# Altium PCB sensor_good.PcbDoc (part 3 of 3)
Units mil, origin at the board's own origin, x right, y up, seen from the top; angles counter-clockwise.
Board outline 3543.31 x 2755.91 mil, 6 copper layers (TOP, GND1, Sig1, Sig2, GND2, BOT), stack 32.112 mil thick; 126 components, 166 nets, 710 pads, 273 vias.
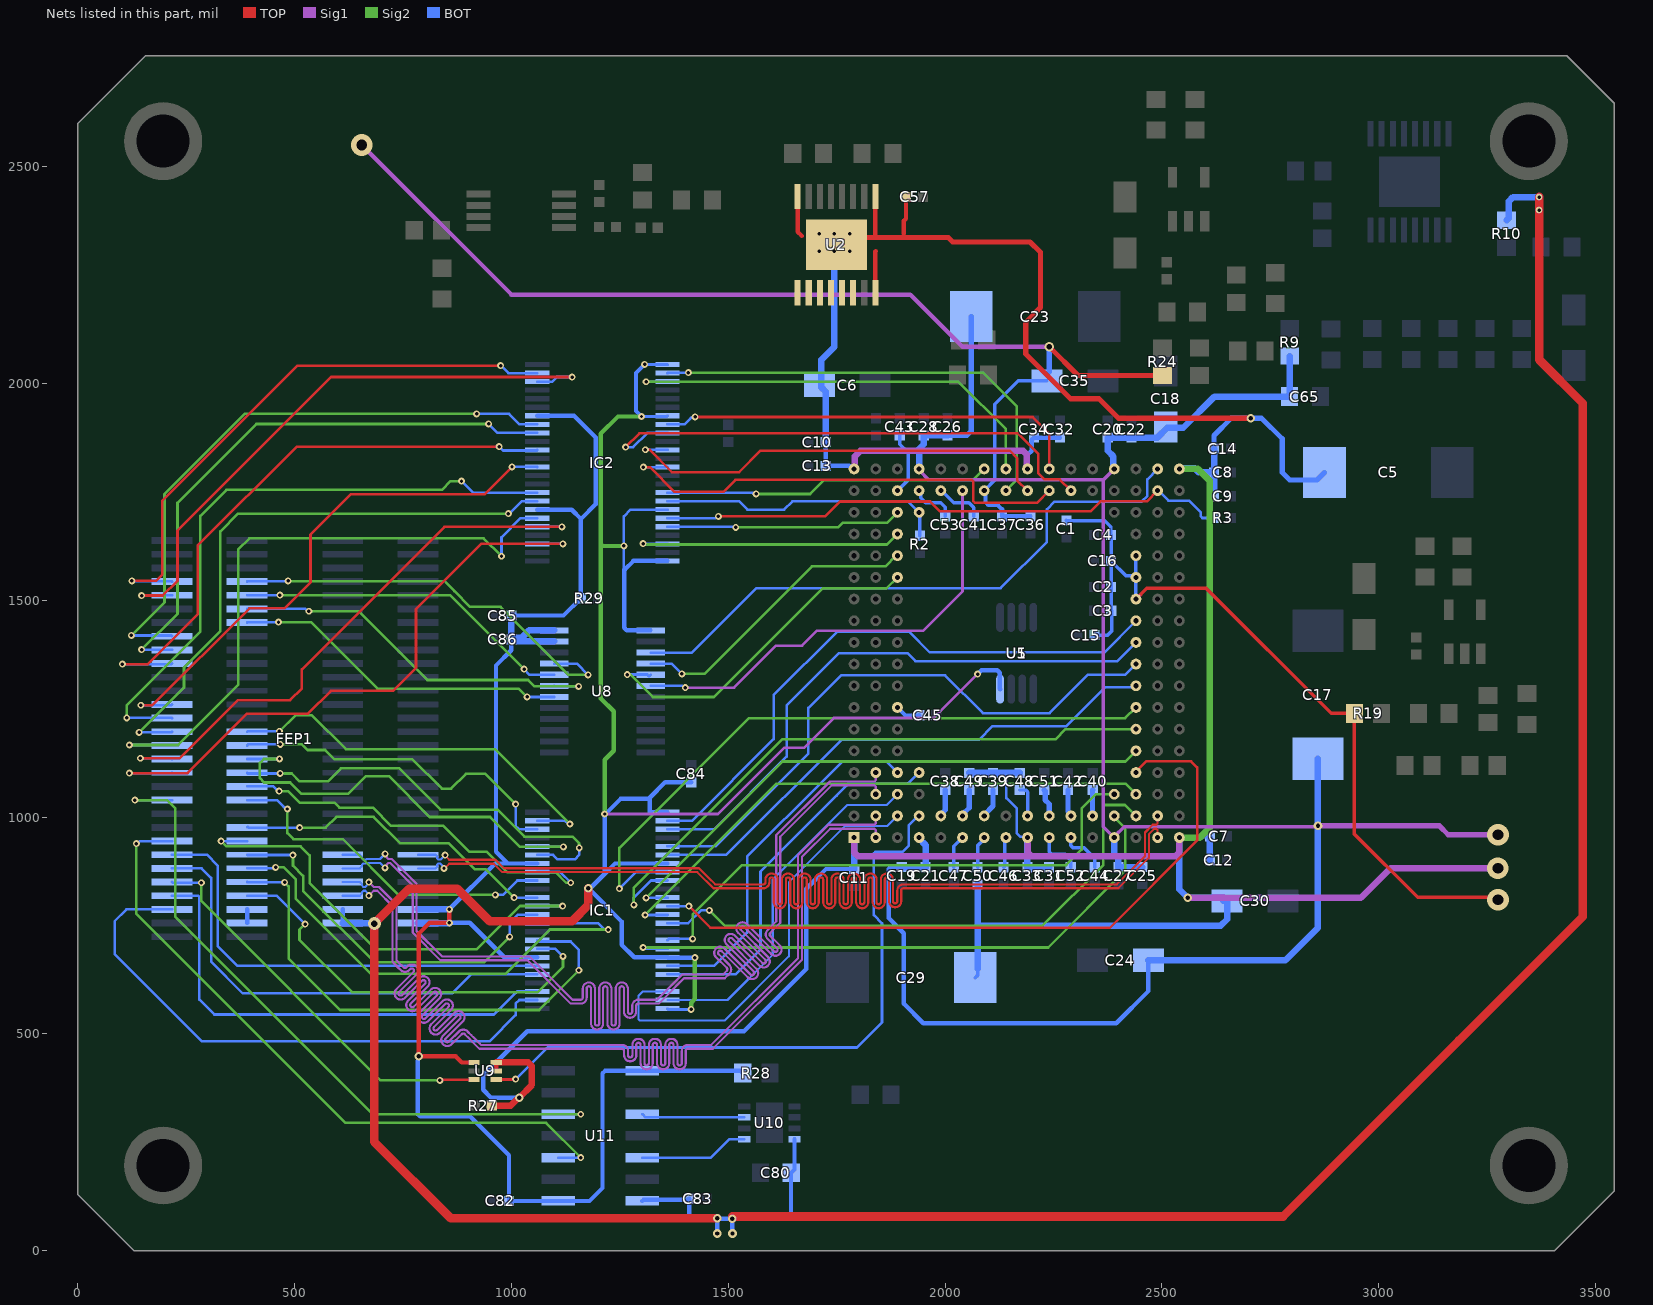
[diagram p7: the nets of this part, all layers, seen from the top]

## Via types
v1: diameter 16, hole 8, TOP to BOT, 215 vias
v2: diameter 20, hole 10, TOP to BOT, 40 vias
v3: diameter 30, hole 15, TOP to BOT, 8 vias
v4: diameter 50, hole 25, TOP to BOT, 5 vias
v5: diameter 19.7, hole 7.99, TOP to BOT, 2 vias
v6: diameter 19.7, hole 8, TOP to BOT, 2 vias
v7: diameter 22, hole 12, TOP to BOT, 1 vias

## Nets (pads, with @x,y where several pads share a name; then routed paths per layer and width w, separated by ;. In a path a pad name is that pad's centre, name@x,y a point inside that pad or via, vN(x,y) a via of type N, cw(c..) or ccw(c..) an arc to the next point about the centre after c; other vN are vias at no path point) (continued)
OUT6_TOP_N: FEP1.B6 U1.B3 | length 2857.5
  Sig1 w5: v1(708.56,882.94) 708.56,885.92 713.09,890.44 713.09,891.75 716.01,894.68 720.16,894.68 772.41,842.43 772.41,733.86 836.27,670 1037.27,670 1137.27,570 1152.64,570 1159.64,570 ccw(c1159.64,584) 1173.64,584 1173.64,605 cw(c1178.64,605) 1183.64,605 1183.64,524.48 ccw(c1197.64,524.48) 1211.64,524.48 1211.64,605 cw(c1216.64,605) 1221.64,605 1221.64,524.48 ccw(c1235.64,524.48) 1249.64,524.48 1249.64,605 cw(c1254.64,605) 1259.64,605 1259.64,551.46 ccw(c1273.64,551.46) 1287.64,551.46 1287.64,565 cw(c1292.64,565) 1292.64,570 1319.11,570 1339.63,570 1397.99,628.36 1471.64,628.36 1492.09,628.36 1502.87,639.14 ccw(c1492.97,649.04) 1502.85,658.96 1478.13,683.68 ; 1478.09,690.76 ccw(c1481.64,687.24) 1478.11,683.69 ; 1478.12,690.79 cw(c1481.64,687.24) 1485.18,690.77 1545.18,630.77 ccw(c1555.12,640.63) 1565.01,630.74 ccw(c1555.12,640.63) 1565,650.55 1502.36,713.19 cw(c1505.91,716.71) 1502.36,720.23 ; 1502.39,720.26 cw(c1505.91,716.71) 1509.44,720.25 ; 1509.47,720.22 1572.05,657.64 ; 1572.05,657.64 ccw(c1581.99,667.5) 1591.88,657.61 ccw(c1581.99,667.5) 1591.87,677.42 1529.23,740.06 cw(c1532.78,743.58) 1529.23,747.1 cw(c1532.78,743.58) 1536.31,747.12 1598.92,684.51 ccw(c1608.86,694.37) 1618.75,684.48 ccw(c1608.86,694.37) 1618.74,704.29 1596.94,726.09 cw(c1600.45,729.65) 1596.91,733.18 ; 1596.94,733.21 1601.86,738.14 1620,756.27 1620,955 1738.45,1073.45 1837.43,1073.45 1840.35,1070.52 U1.B3@1840.35,1052.95
  BOT w5: FEP1.B6@611.18,881.89 650.55,881.89 655.93,887.26 655.93,890.21 658.85,893.14 669.39,893.14 670.93,894.68 696.9,894.68 708.56,883.02 v1(708.56,882.94)
OUT6_TOP_P: FEP1.B7 U1.B4 | length 2857.8
  Sig1 w5: v1(708.72,915.42) 708.72,912.44 713.09,908.08 713.09,906.61 716.01,903.68 723.88,903.68 781.41,846.16 781.41,737.59 840,679 1041,679 1063.93,656.07 1141,579 1152.64,579 1159.64,579 ccw(c1159.64,584) 1164.64,584 1164.64,605 cw(c1178.64,605) 1192.64,605 1192.64,524.48 ccw(c1197.64,524.48) 1202.64,524.48 1202.64,605 cw(c1216.64,605) 1230.64,605 1230.64,524.48 ccw(c1235.64,524.48) 1240.64,524.48 1240.64,605 cw(c1254.64,605) 1268.64,605 1268.64,551.46 ccw(c1273.64,551.46) 1278.64,551.46 1278.64,565 cw(c1292.64,565) 1292.64,579 1319.11,579 1335.9,579 1394.26,637.36 1462.64,637.36 1488.36,637.36 1496.48,645.48 ; 1496.49,645.49 ccw(c1492.97,649.04) 1496.51,652.58 ; 1496.48,652.6 1471.74,677.34 cw(c1481.64,687.24) 1470.43,695.61 1470.43,695.82 1473.06,698.45 1473.27,698.45 cw(c1481.64,687.24) 1491.56,697.12 1551.59,637.09 ccw(c1555.12,640.63) 1558.63,637.08 ; 1515.83,726.59 1578.46,663.96 ccw(c1581.99,667.5) 1585.5,663.95 ; 1515.82,726.6 ccw(c1505.91,716.71) 1497.53,727.93 1497.32,727.93 1494.69,725.3 1494.69,725.09 ccw(c1505.91,716.71) 1496.04,706.78 1558.63,644.2 ; 1558.65,644.17 cw(c1555.12,640.63) 1558.67,637.12 ; 1585.5,671.07 1522.91,733.65 cw(c1532.78,743.58) 1521.56,751.96 1521.56,752.17 1524.19,754.8 1524.4,754.8 cw(c1532.78,743.58) 1542.69,753.47 1605.33,690.83 ccw(c1608.86,694.37) 1612.37,690.82 ; 1585.54,663.99 ccw(c1581.99,667.5) 1585.52,671.04 ; 1612.41,690.86 ccw(c1608.86,694.37) 1612.39,697.91 1590.58,719.72 cw(c1600.45,729.65) 1590.57,739.57 1595.5,744.5 1611,760 1611,958.73 1734.72,1082.45 1837.43,1082.45 1840.35,1085.38 U1.B4@1840.35,1102.95
  BOT w5: FEP1.B7@611.18,913.39 650.55,913.39 655.93,908.01 655.93,905.07 658.85,902.14 665.66,902.14 667.2,903.68 696.9,903.68 v1(708.72,915.42) v1(708.72,915.42)
OUT7_BOT_N: FEP1.A6 U1.R1 | length 2848
  TOP w5: v1(844.65,881.89) 845.88,881.89 856.63,892.65 959.62,892.65 978.99,873.27 1429,873.27 1466.27,836 1574,836 1581,836 ccw(c1581,850) 1595,850 1595,856 cw(c1600,856) 1605,856 1605,804 ccw(c1619,804) 1633,804 1633,856 cw(c1638,856) 1643,856 1643,804 ccw(c1657,804) 1671,804 1671,856 cw(c1676,856) 1681,856 1681,804 ccw(c1695,804) 1709,804 1709,856 cw(c1714,856) 1719,856 1719,804 ccw(c1733,804) 1747,804 1747,856 cw(c1752,856) 1757,856 1757,804 ccw(c1771,804) 1785,804 1785,856 cw(c1790,856) 1795,856 1795,804 ccw(c1809,804) 1823,804 1823,856 cw(c1828,856) 1833,856 1833,804 ccw(c1847,804) 1861,804 1861,856 cw(c1866,856) 1871,856 1871,806.18 ccw(c1885,806.18) 1899,806.18 1899,831 cw(c1904,831) 1904,836 2017.19,836 2399.73,836 2470,906.27 2470,960.88 2482.57,973.45 2487.43,973.45 2490.35,970.52 U1.R1@2490.35,952.95
  BOT w5: FEP1.A6@784.41,881.89 824.98,881.89 828.98,885.89 828.98,890.21 831.91,893.14 836.05,893.14 844.65,884.53 v1(844.65,881.89)
OUT7_BOT_P: FEP1.A7 U1.R2 | length 2846.7
  TOP w5: v1(847.1,912.4) 847.1,911.18 856.63,901.65 963.34,901.65 982.72,882.27 1432.73,882.27 1453.93,861.07 1470,845 1574,845 1581,845 ccw(c1581,850) 1586,850 1586,856 cw(c1600,856) 1614,856 1614,804 ccw(c1619,804) 1624,804 1624,856 cw(c1638,856) 1652,856 1652,804 ccw(c1657,804) 1662,804 1662,856 cw(c1676,856) 1690,856 1690,804 ccw(c1695,804) 1700,804 1700,856 cw(c1714,856) 1728,856 1728,804 ccw(c1733,804) 1738,804 1738,856 cw(c1752,856) 1766,856 1766,804 ccw(c1771,804) 1776,804 1776,856 cw(c1790,856) 1804,856 1804,804 ccw(c1809,804) 1814,804 1814,856 cw(c1828,856) 1842,856 1842,804 ccw(c1847,804) 1852,804 1852,856 cw(c1866,856) 1880,856 1880,806.18 ccw(c1885,806.18) 1890,806.18 1890,831 cw(c1904,831) 1904,845 2017.19,845 2396,845 2461,910 2461,964.61 2478.84,982.45 2487.43,982.45 2490.35,985.38 U1.R2@2490.35,1002.95
  BOT w5: FEP1.A7@784.41,913.39 824.98,913.39 828.98,909.39 828.98,905.07 831.91,902.14 836.54,902.14 846.8,912.4 v1(847.1,912.4)
OUT7_TOP_N: FEP1.B4 U1.B1 | length 2856.7
  Sig1 w5: v1(671.43,818.9) 682.67,830.15 690.85,830.15 726,795 726,666.27 739.91,652.36 743.54,648.73 744.83,647.44 ccw(c754.76,657.31) 764.68,647.43 766.95,649.69 ; 766.97,649.72 cw(c770.51,646.18) 774.02,649.74 ; 774.02,642.62 734.82,603.42 ccw(c744.69,593.5) 734.79,583.6 ccw(c744.69,593.5) 754.61,583.61 793.82,622.82 ; 774.04,642.65 ccw(c770.51,646.18) 774.06,649.7 ; 788.55,549.67 ccw(c798.43,539.76) 788.53,529.86 ccw(c798.43,539.76) 808.35,529.88 ; 788.56,549.68 827.76,588.88 ; 793.84,622.85 cw(c797.38,619.31) 800.89,622.87 ; 800.89,615.75 761.69,576.55 ccw(c771.56,566.63) 761.66,556.73 ccw(c771.56,566.63) 781.48,556.74 820.69,595.95 ; 800.91,615.78 ccw(c797.38,619.31) 800.93,622.83 ; 808.36,529.88 847.56,569.08 ; 820.71,595.98 cw(c824.25,592.44) 827.76,596 ; 827.78,588.91 ccw(c824.25,592.44) 827.8,595.96 ; 842.29,495.93 ccw(c852.17,486.02) 842.27,476.12 ccw(c852.17,486.02) 862.09,476.14 ; 842.3,495.94 881.5,535.14 ; 847.58,569.11 cw(c851.12,565.57) 854.63,569.13 ; 854.67,569.09 cw(c851.12,565.57) 854.65,562.04 815.43,522.81 ccw(c825.3,512.89) 815.4,502.99 ccw(c825.3,512.89) 835.22,503.01 874.43,542.21 ; 862.1,476.14 885.55,499.6 ; 874.45,542.24 cw(c877.99,538.7) 881.5,542.26 ; 881.52,535.17 ccw(c877.99,538.7) 881.54,542.22 ; 885.56,499.61 cw(c889.11,496.09) 892.66,499.61 902.51,489.76 ccw(c905.71,492.93) 902.55,489.72 907.48,484.79 926.27,466 1222.76,466 1255,466 cw(c1255,461) 1260,461 1260,450.98 ccw(c1274,450.98) 1288,450.98 1288,474.87 cw(c1293,474.87) 1298,474.87 1298,432.57 ccw(c1312,432.57) 1326,432.57 1326,474.87 cw(c1331,474.87) 1336,474.87 1336,432.57 ccw(c1350,432.57) 1364,432.57 1364,474.87 cw(c1369,474.87) 1374,474.87 1374,432.57 ccw(c1388,432.57) 1402,432.57 1402,461 cw(c1407,461) 1407,466 1414,466 1464.73,466 1670,671.27 1670,908.45 1735,973.45 1837.43,973.45 1840.35,970.52 U1.B1@1840.35,952.95
  BOT w5: FEP1.B4@611.18,818.9 650.55,818.9 655.93,824.27 655.93,827.22 658.85,830.15 663,830.15 671.43,821.72 v1(671.43,818.9)
OUT7_TOP_P: FEP1.B5 U1.B2 | length 2856.7
  Sig1 w5: v1(671.43,850.39) 682.67,839.15 694.58,839.15 735,798.73 735,670 746.28,658.72 749.91,655.09 751.21,653.79 ; 741.15,589.97 cw(c744.69,593.5) 741.16,597.03 ; 741.16,589.96 ccw(c744.69,593.5) 748.23,589.96 787.45,629.19 ; 741.18,597.06 780.38,636.26 ccw(c770.51,646.18) 780.41,656.08 ccw(c770.51,646.18) 760.59,656.07 758.32,653.8 ; 751.21,653.79 ccw(c754.76,657.31) 758.31,653.79 ; 768.03,563.09 ccw(c771.56,566.63) 775.1,563.09 ; 768.02,563.1 cw(c771.56,566.63) 768.03,570.16 807.25,609.39 ; 775.12,563.12 814.32,602.32 cw(c824.25,592.44) 834.15,602.34 cw(c824.25,592.44) 834.13,582.53 794.92,543.32 ; 787.46,629.2 cw(c797.38,619.31) 807.28,629.21 cw(c797.38,619.31) 807.26,609.4 ; 794.9,543.29 ccw(c798.43,539.76) 794.89,536.23 ccw(c798.43,539.76) 801.97,536.22 ; 801.99,536.25 841.19,575.45 cw(c851.12,565.57) 861.02,575.47 cw(c851.12,565.57) 861,555.66 821.79,516.45 ; 821.77,516.42 ccw(c825.3,512.89) 821.76,509.36 ccw(c825.3,512.89) 828.84,509.35 ; 828.86,509.38 868.06,548.58 cw(c877.99,538.7) 887.89,548.6 cw(c877.99,538.7) 887.87,528.79 848.66,489.58 ; 848.64,482.48 ccw(c852.17,486.02) 855.71,482.48 ; 848.63,482.49 cw(c852.17,486.02) 848.64,489.55 ; 855.73,482.51 879.19,505.96 cw(c889.11,496.09) 899.03,505.97 907.57,497.43 913.84,491.16 927.28,477.72 930,475 1222.76,475 1255,475 cw(c1255,461) 1269,461 1269,450.98 ccw(c1274,450.98) 1279,450.98 1279,474.87 cw(c1293,474.87) 1307,474.87 1307,432.57 ccw(c1312,432.57) 1317,432.57 1317,474.87 cw(c1331,474.87) 1345,474.87 1345,432.57 ccw(c1350,432.57) 1355,432.57 1355,474.87 cw(c1369,474.87) 1383,474.87 1383,432.57 ccw(c1388,432.57) 1393,432.57 1393,461 cw(c1407,461) 1407,475 1414,475 1461,475 1661,675 1661,912.18 1731.27,982.45 1837.43,982.45 1840.35,985.38 U1.B2@1840.35,1002.95
  BOT w5: FEP1.B5@611.18,850.39 650.55,850.39 655.93,845.02 655.93,842.07 658.85,839.15 663,839.15 671.43,847.57 v1(671.43,850.39)
R_VREF_FL: C46.1 U1.H1 | length 70.8
  BOT w8: C46.1@2135,884.37 2137.68,887.05 2137.68,950.28 U1.H1@2140.35,952.95
RAMP: U1.R18 U8.3 | length 1411.1
  BOT w6: U8.3@1321,1379.57 1416.39,1379.57 1565.14,1528.32 2128.32,1528.32 2235,1635 2235,1710 2252.49,1727.49 2453.24,1727.49 2466.6,1740.85 2466.6,1779.2 U1.R18@2490.35,1802.95
RAMP_25: FEP1.C27 U8.21 | length 965.5
  Sig2 w6: v1(485,1545) 485.79,1544.21 845.79,1544.21 868.71,1521.29 905,1485 975,1485 1131.69,1328.31 v1(1177.05,1328.31)
  BOT w6: FEP1.C27@390.71,1543.31 391.56,1544.15 484.15,1544.15 v1(485,1545) ; U8.21@1099,1353.98 1151.38,1353.98 v1(1177.05,1328.31)
READ: IC2.13 U1.K17 | length 1087
  TOP w6: v1(1304.49,1807.03) 1319.4,1807.03 1376.43,1750 1488.75,1750 1516.54,1777.79 2062.01,1777.79 2065.53,1774.28 2065.53,1728.51 2069.04,1725 2212.4,1725 U1.K17@2240.35,1752.95
  BOT w6: v1(1304.49,1807.03) 1359.55,1807.03 IC2.13@1360,1807.48
READ_25: FEP1.D18 IC2.36 | length 1279.4
  TOP w6: v1(145.53,1258.13) 172.12,1258.13 395.74,1481.75 477.12,1481.75 536.71,1541.34 536.71,1651.89 629.82,1745 938.83,1745 v1(1001.47,1807.64)
  BOT w6: v1(145.53,1258.13) 215.77,1258.13 FEP1.D18@217.48,1259.84 ; v1(1001.47,1807.64) 1059.68,1807.64 IC2.36@1059.84,1807.48
ROW<0>: IC1.2 U1.P11 | length 1369.9
  BOT w6: IC1.2@1360.08,991.69 1416.69,991.69 1605,1180 1605,1281.84 1750.41,1427.24 1917.76,1427.24 1964.77,1380.23 2367.64,1380.23 U1.P11@2440.35,1452.95
ROW<0>_25: FEP1.C16 IC1.47 | length 942.4
  Sig2 w6: v1(464.95,1198.14) 501.82,1235 540,1235 618.2,1156.8 962.58,1156.8 v1(1135.12,984.25)
  BOT w6: FEP1.C16@390.71,1196.85 392,1198.14 v1(464.95,1198.14) ; IC1.47@1059.92,991.69 1123.73,991.69 1131.17,984.25 v1(1135.12,984.25)
ROW<1>: IC1.3 U1.P10 | length 1342.9
  BOT w6: IC1.3@1360.08,972.01 1467.01,972.01 1635,1140 1635,1257.62 1755.77,1378.38 1913.05,1378.38 1931.43,1360 2397.4,1360 U1.P10@2440.35,1402.95
ROW<1>_25: FEP1.C15 IC1.46 | length 809.4
  Sig2 w6: v1(467,1168.07) 516.93,1168.07 530,1155 570.35,1155 591.5,1133.86 771.36,1133.86 839.65,1065.58 860.79,1065.58 895.22,1100 940,1100 975,1065 v1(1010,1030)
  BOT w6: FEP1.C15@390.71,1165.35 393.43,1168.07 v1(467,1168.07) ; v1(1010,1030) 1010,980 1015.02,974.98 1017.99,972.01 IC1.46@1059.92,972.01
ROW<2>: IC1.5 U1.P9 | length 1387.8
  BOT w6: IC1.5@1360.08,932.64 1470.46,932.64 1685,1147.18 1685,1251.73 1760.37,1327.1 2000.16,1327.1 2087.26,1240 2241.13,1240 2329.67,1328.55 2415.95,1328.55 U1.P9@2440.35,1352.95
ROW<2>_25: FEP1.C14 IC1.44 | length 1019.4
  Sig2 w6: v1(465.3,1134.25) 429.25,1134.25 420,1125 420,1090 430,1080 490,1080 516.39,1053.61 623.61,1053.61 664.72,1094.72 717.33,1094.72 811.59,1000.45 951.05,1000.45 1020,931.51 v1(1120.16,931.51)
  BOT w6: FEP1.C14@390.71,1133.86 391.1,1134.25 v1(465.3,1134.25) ; IC1.44@1059.92,932.64 1061.05,931.51 v1(1120.16,931.51)
ROW<3>: IC1.6 U1.P8 | length 1241.8
  BOT w6: IC1.6@1360.08,912.95 1495.45,912.95 1760.82,1178.32 2078.32,1178.32 2110,1210 2280,1210 2370,1300 2437.4,1300 U1.P8@2440.35,1302.95
ROW<3>_25: FEP1.C13 IC1.43 | length 989.6
  Sig2 w6: v1(466.66,1100.76) 493.56,1100.76 511.7,1082.63 577.33,1082.63 607.15,1112.45 741.47,1112.45 836.57,1017.34 967.91,1017.34 1030.25,955 1141.39,955 1155.92,940.46 1155.92,929.58 v1(1156.5,929)
  BOT w6: FEP1.C13@390.71,1102.36 392.31,1100.76 v1(466.66,1100.76) ; IC1.43@1059.92,912.95 1096.46,912.95 1106.53,902.88 1146.43,902.88 1156.5,912.95 v1(1156.5,929)
ROW<4>: IC1.8 U1.P7 | length 1546.1
  Sig2 w6: v1(1249.15,835.21) 1249.15,929.19 1548.1,1228.14 2415.55,1228.14 U1.P7@2440.35,1252.95
  BOT w6: v1(1249.15,835.21) 1287.52,873.58 IC1.8@1360.08,873.58
ROW<4>_25: FEP1.C12 IC1.41 | length 925.5
  Sig2 w6: v1(464.44,1060.04) 484.95,1060.04 512.11,1032.87 592.87,1032.87 603.74,1022.01 680.97,1022.01 722.97,980 843.27,980 903.27,920 943.37,920 990.1,873.27 1101.73,873.27 1126.22,848.78 v1(1136.95,848.78)
  BOT w6: FEP1.C12@390.71,1070.87 451.22,1070.87 462.05,1060.04 v1(464.44,1060.04) ; IC1.41@1059.92,873.58 1112.15,873.58 v1(1136.95,848.78)
ROW<5>: IC1.9 U1.P6 | length 1459.8
  Sig2 w6: v1(1282.37,797.69) 1282.37,837.35 1338.29,893.27 1624.34,1179.32 2254.32,1179.32 2277.95,1202.95 U1.P6@2440.35,1202.95
  BOT w6: v1(1282.37,797.69) 1282.37,814.39 1321.88,853.9 IC1.9@1360.08,853.9
ROW<5>_25: FEP1.C11 IC1.40 | length 805.9
  Sig2 w6: v1(483.31,1018.87) 483.31,963.17 497.26,949.22 611.15,949.22 739.37,821 v1(963.34,821)
  BOT w6: FEP1.C11@390.71,1039.37 459.57,1039.37 475.67,1023.27 476.21,1023.27 480.61,1018.87 v1(483.31,1018.87) ; v1(963.34,821) 980.91,821 1013.81,853.9 IC1.40@1059.92,853.9
ROW<6>: IC1.11 U1.P5 | length 1319.7
  Sig2 w6: v1(1310.65,814.07) 1624.91,1128.33 2415.73,1128.33 U1.P5@2440.35,1152.95
  BOT w6: v1(1310.65,814.07) 1359.62,814.07 IC1.11@1360.08,814.53
ROW<6>_25: FEP1.C9 IC1.38 | length 758.4
  Sig2 w6: v1(511.74,975.83) 571.34,975.83 596.42,1000.91 682.62,1000.91 743.53,940 855.22,940 915.22,880 940.84,880 v1(1006.47,814.37)
  BOT w6: FEP1.C9@390.71,976.38 392.19,977.86 394.22,975.83 v1(511.74,975.83) ; v1(1006.47,814.37) 1059.77,814.37 IC1.38@1059.92,814.53
ROW<7>: IC1.12 U1.P4 | length 1652.7
  TOP w6: v1(1409.36,794.75) 1459.11,745 2379.93,745 2581.38,946.46 2581.38,1114.83 2567.38,1128.83 2463.83,1128.83 2440.35,1105.35 U1.P4@2440.35,1102.95
  BOT w6: IC1.12@1360.08,794.84 1360.17,794.75 v1(1409.36,794.75)
ROW<7>_25: FEP1.C8 IC1.37 | length 1088.9
  Sig2 w6: v1(330.46,944.88) 342.53,932.82 513.85,932.82 535,911.66 535,847.82 687.82,695 920,695 1020.1,795.1 v1(1118.24,795.1)
  BOT w6: v1(330.46,944.88) FEP1.C8@390.71,944.88 ; IC1.37@1059.92,794.84 1060.02,794.74 1060.38,795.1 v1(1118.24,795.1)
ROW<8>: IC1.13 U1.P3 | length 1319.1
  Sig2 w6: v1(1308.59,774.42) 1611.52,1077.35 2415.96,1077.35 U1.P3@2440.35,1052.95
  BOT w6: v1(1308.59,774.42) 1359.34,774.42 IC1.13@1360.08,775.16
ROW<8>_25: FEP1.C7 IC1.36 | length 871.3
  Sig2 w6: v1(496.36,912.65) 496.36,888.09 519.72,864.72 519.72,830.28 685,665 936.65,665 v1(995.82,724.17)
  BOT w6: FEP1.C7@390.71,913.39 391.74,912.35 392.04,912.65 v1(496.36,912.65) ; v1(995.82,724.17) 995.82,756.18 1014.8,775.16 IC1.36@1059.92,775.16
ROW<9>: IC1.14 U1.P2 | length 1311.5
  Sig2 w6: v1(1456.66,785) 1491.66,750 2225,750 2365.17,890.17 2365.17,1024.66 2368.69,1028.18 2415.13,1028.18 U1.P2@2440.35,1002.95
  BOT w6: IC1.14@1360.08,755.47 1407.87,755.47 1437.4,785 v1(1456.66,785)
ROW<9>_25: FEP1.C6 IC1.35 | length 1172.8
  Sig2 w6: v1(456.21,884.1) 475.52,884.1 502.55,857.07 502.55,812.46 675.66,639.34 987.27,639.34 1088.82,740.88 v1(1223.42,740.88)
  BOT w6: FEP1.C6@390.71,881.89 451.29,881.89 453.51,884.1 v1(456.21,884.1) ; IC1.35@1059.92,755.47 1199.71,755.47 1214.31,740.88 v1(1223.42,740.88)
ROW<10>: IC1.16 U1.N3 | length 1258.4
  Sig2 w6: v1(1417.97,719.45) 1417.97,775.71 1531.49,889.22 2279.22,889.22 2315,925 2315,1020 2347.95,1052.95 U1.N3@2390.35,1052.95
  BOT w6: IC1.16@1360.08,716.1 1363.43,719.45 v1(1417.97,719.45)
ROW<10>_25: FEP1.C5 IC1.33 | length 1174.8
  Sig2 w6: v1(477.08,849.81) 486.2,840.69 486.2,673.95 604.75,555.4 1064.12,555.4 v1(1155.71,646.99)
  BOT w6: FEP1.C5@390.71,850.39 391.29,849.81 v1(477.08,849.81) ; IC1.33@1059.92,716.1 1062.83,713.2 1136.59,713.2 1155.71,694.09 v1(1155.71,646.99)
ROW<11>FOT: IC1.17 U1.N2 | length 1378.9
  Sig2 w6: v1(1303.92,699.47) 2238.06,699.47 2415.47,876.88 2415.47,974.53 2390.35,999.65 U1.N2@2390.35,1002.95
  BOT w6: v1(1303.92,699.47) 1306.63,699.47 1309.68,696.42 IC1.17@1360.08,696.42
ROW<11>FOT_25: FEP1.C4 IC1.32 | length 974.5
  Sig2 w6: v1(524.22,753.58) 511.48,740.83 511.48,717.22 632.17,596.53 1060.9,596.53 1119.08,654.71 v1(1119.08,678.84)
  BOT w6: FEP1.C4@390.71,818.9 458.9,818.9 v1(524.22,753.58) ; IC1.32@1059.92,696.42 1101.51,696.42 v1(1119.08,678.84)
RST: IC2.22 U1.C15 | length 655.1
  Sig2 w6: v1(1303.67,1630.66) 1305.58,1628.75 1312.13,1628.75 1312.18,1628.69 1866.1,1628.69 U1.C15@1890.35,1652.95
  BOT w6: v1(1303.67,1630.66) 1303.84,1630.49 1359.83,1630.49 IC2.22@1360,1630.31 1360.27,1630.04 1360.27,1630.39 IC2.22@1360,1630.66
RST_25: FEP1.D13 IC2.27 | length 1456.7
  TOP w6: v1(118.92,1101.54) 253.3,1101.54 390.38,1238.61 531.23,1238.61 583.96,1291.34 727.35,1291.34 780,1343.99 780,1480 930.23,1630.23 v1(1118.92,1630.23)
  BOT w6: v1(118.92,1101.54) 216.65,1101.54 FEP1.D13@217.48,1102.36 ; IC2.27@1059.84,1630.31 1059.93,1630.23 v1(1118.92,1630.23)
RST_DIV_N_IN: IC2.19 R3.1 U1.R17 | length 1336.8
  TOP w6: v1(1477.28,1693.53) 1723.53,1693.53 1757.91,1727.91 1965.65,1727.91 1988.56,1705 2335,1705 2358.45,1728.45 2465.85,1728.45 U1.R17@2490.35,1752.95
  BOT w6: IC2.19@1360,1689.37 1470.42,1689.37 1474.58,1693.53 v1(1477.28,1693.53) ; U1.R17@2490.35,1752.95 2492.05,1752.95 2515,1730 2562.28,1730 2590,1702.28 2590,1693.51 2593.51,1690 R3.1@2620.31,1690
RST_DIV_N_IN_25: FEP1.D15 IC2.30 | length 1499
  Sig2 w6: v1(118.92,1166.42) 231.42,1166.42 370,1305 370,1617.09 395.87,1642.96 935.99,1642.96 v1(977.22,1601.73)
  BOT w6: v1(118.92,1166.42) 216.42,1166.42 FEP1.D15@217.48,1165.35 ; v1(977.22,1601.73) 977.22,1645.21 1021.37,1689.37 IC2.30@1059.84,1689.37
SAM_B: IC2.8 U1.K18 | length 984.9
  TOP w6: v1(1423.79,1922.9) 2202.1,1922.9 2240.35,1884.65 U1.K18@2240.35,1802.95
  BOT w6: IC2.8@1360,1905.91 1398.68,1905.91 1413.77,1920.99 1421.87,1920.99 v1(1423.79,1922.9)
SAM_B_25: FEP1.D23 IC2.41 | length 1398.6
  Sig2 w6: v1(123.65,1419.02) 200,1495.38 200,1745 385,1930 v1(920,1930)
  BOT w6: v1(123.65,1419.02) 215.78,1419.02 FEP1.D23@217.48,1417.32 ; v1(920,1930) 995,1930 1019.09,1905.91 IC2.41@1059.84,1905.91
SAM_T: IC2.9 U1.L17 | length 1231
  TOP w6: v1(1263.42,1853.32) 1295.1,1885 2167.95,1885 2214.69,1838.25 2214.69,1793.82 2229.69,1778.83 2264.48,1778.83 U1.L17@2290.35,1752.95
  BOT w6: v1(1263.42,1853.32) 1280.99,1853.32 1313.89,1886.22 IC2.9@1360,1886.22
SAM_T_25: FEP1.D22 IC2.40 | length 1359
  Sig2 w6: v1(147.52,1386.47) 230,1468.96 230,1725 411.77,1906.77 v1(947.76,1906.77) v1@946.03,1905.04
  BOT w6: v1(147.52,1386.47) 216.84,1386.47 FEP1.D22@217.48,1385.83 ; v1(947.76,1906.77) 968.31,1886.22 IC2.40@1059.84,1886.22
SCK: U10.5 U11.12 | length 252.4
  BOT w6: U11.12@1302,215 1460,215 1502,257 U10.5@1537,257
SCK_25: FEP1.D8 U11.3 | length 1556
  Sig2 w6: v1(135.39,939.03) 135.39,776.9 617.28,295 1080,295 v1(1160,215)
  BOT w6: v1(135.39,939.03) 138.05,939.03 143.9,944.88 FEP1.D8@217.48,944.88 ; U11.3@1108,215 v1(1160,215)
SDO: U10.7 U11.10 | length 237.9
  BOT w6: U11.10@1302,315 1309,308 U10.7@1537,308
SDO_25: FEP1.D11 U11.5 | length 1612
  Sig2 w6: v1(131.99,1039.37) 205.63,1039.37 225,1020 225,770 680,315 v1(1160,315)
  BOT w6: v1(131.99,1039.37) FEP1.D11@217.48,1039.37 ; U11.5@1108,315 v1(1160,315)
SEL: IC2.20 U1.C16 | length 545.5
  Sig2 w6: v1(1517.4,1668.29) 1753.29,1668.29 1763.78,1678.78 1866.18,1678.78 U1.C16@1890.35,1702.95
  BOT w6: IC2.20@1360,1669.69 1360.2,1669.88 1515.8,1669.88 v1(1517.4,1668.29)
SEL_25: FEP1.D14 IC2.29 | length 1348.9
  TOP w6: v1(144.6,1135.84) 235.11,1135.84 369.18,1269.91 489.91,1269.91 516.89,1296.89 516.89,1340.61 845.88,1669.61 v1(1116.45,1669.61)
  BOT w6: v1(144.6,1135.84) 215.5,1135.84 FEP1.D14@217.48,1133.86 ; IC2.29@1059.84,1669.69 1059.92,1669.61 v1(1116.45,1669.61)
SPI_CLK: IC1.23 U1.C3 | length 828.5
  BOT w5: IC1.23@1360.08,578.31 1498.31,578.31 1602.74,682.74 1602.74,856.27 1774.73,1028.26 1865.67,1028.26 U1.C3@1890.35,1052.95
SPI_CLK_25: FEP1.D3 IC1.26 | length 1332.1
  BOT w6: FEP1.D3@217.48,787.4 112.4,787.4 85,760 85,685 286.8,483.2 949.41,483.2 1010,543.79 1010,570 1018.31,578.31 IC1.26@1059.92,578.31
SPI_DATA: IC1.22 U1.C2 | length 1018.7
  BOT w5: IC1.22@1360.08,597.99 1302.99,597.99 1293.24,588.24 1293.24,534.06 1296.17,531.13 1491.71,531.13 1640,679.42 1640,850 1770,980 1867.4,980 U1.C2@1890.35,1002.95
SPI_DATA_25: FEP1.D4 IC1.27 | length 1116.1
  BOT w6: FEP1.D4@217.48,818.9 277.09,818.9 280.6,815.38 280.6,579.4 315,545 960,545 1012.99,597.99 IC1.27@1059.92,597.99
SPI_OUT: U1.D2 U9.4 | length 1510.6
  TOP w6: U9.4@965,395 1008.86,395 v1(1009.91,396.05)
  Sig1 w6: U1.D2@1940.35,1001.84 U1.D2@1940.35,1002.95
  BOT w6: v1(1009.91,396.05) 1010.41,396.05 1083.33,468.97 1796.69,468.97 1854.69,526.97 1854.69,755.31 1836.06,773.94 1836.06,916.49 1839.58,920 1902.38,920 1916.08,933.7 1916.08,981.08 1937.95,1002.95 U1.D2@1940.35,1002.95
SPI_OUT_25: FEP1.D5 U9.3 | length 911.3
  TOP w6: v1(835.15,393.21) 836.04,394.1 912.92,394.1 U9.3@913.82,395
  Sig2 w6: v1(285.14,848.74) 285.14,806.28 698.21,393.21 v1(835.15,393.21)
  BOT w6: FEP1.D5@217.48,850.39 219.13,848.74 v1(285.14,848.74)
SPI_READ: IC1.20 U1.D4 | length 878.6
  BOT w6: IC1.20@1360.08,637.36 1517.36,637.36 1574.55,694.55 1574.55,874.55 1750,1050 1777.19,1077.19 1914.59,1077.19 U1.D4@1940.35,1102.95
SPI_READ_25: FEP1.D6 IC1.29 | length 1092.8
  BOT w6: FEP1.D6@217.48,881.89 285.58,881.89 307.75,859.72 307.75,666.69 380.55,593.89 863.61,593.89 907.08,637.36 IC1.29@1059.92,637.36
SPI_WRITE: IC1.19 U1.C4 | length 838.4
  BOT w6: IC1.19@1360.08,657.05 1467.05,657.05 1543.76,733.76 1543.76,908.76 1720,1085 1763.18,1128.18 1865.13,1128.18 U1.C4@1890.35,1102.95
SPI_WRITE_25: FEP1.D7 IC1.30 | length 1057.6
  BOT w6: FEP1.D7@217.48,913.39 297.71,913.39 322.74,888.35 322.74,702.39 368.08,657.05 IC1.30@1059.92,657.05
SYNC: IC2.11 U1.J17 | length 1042.9
  TOP w6: v1(1308.85,1847.31) 1318.48,1847.31 1370.4,1795.4 1525.4,1795.4 1575,1845 2149.26,1845 2166.5,1827.77 2166.5,1776.81 U1.J17@2190.35,1752.95
  BOT w6: v1(1308.85,1847.31) 1359.54,1847.31 IC2.11@1360,1846.85
SYNC_25: FEP1.D21 IC2.38 | length 1377.1
  TOP w6: v1(102.78,1352.91) 161.76,1352.91 276.67,1467.82 276.67,1626 505.24,1854.57 v1(971.54,1854.57)
  BOT w6: v1(102.78,1352.91) 216.06,1352.91 FEP1.D21@217.48,1354.33 ; v1(971.54,1854.57) 972.07,1854.57 981.15,1845.49 1058.48,1845.49 IC2.38@1059.84,1846.85
SYS_RST_N: IC2.17 R2.1 U1.D16 | length 661.6
  BOT w6: IC2.17@1360,1728.74 1525.01,1728.74 1544.52,1709.23 1629.23,1709.23 1648.3,1728.3 1915,1728.3 U1.D16@1940.35,1702.95
  BOT w8: U1.D16@1940.35,1702.95 1941.23,1702.08 1941.23,1649.77 R2.1@1942.11,1648.89
SYS_RST_N_25: FEP1.D16 IC2.32 | length 1376.9
  Sig2 w6: v1(141.8,1195.59) 245,1298.79 245,1345 328.79,1428.79 328.79,1658.79 369.93,1699.93 v1(993.19,1699.93)
  BOT w6: v1(141.8,1195.59) 216.22,1195.59 FEP1.D16@217.48,1196.85 ; v1(993.19,1699.93) 996.18,1699.93 1024.99,1728.74 IC2.32@1059.84,1728.74
TAC: IC2.16 U1.G18 | length 755.5
  Sig2 w6: v1(1564.58,1745.32) 1688.85,1745.32 1720.64,1777.11 2064.51,1777.11 U1.G18@2090.35,1802.95
  BOT w6: IC2.16@1360,1748.43 1556.06,1748.43 1557.26,1747.23 1562.67,1747.23 v1(1564.58,1745.32)
TAC_25: FEP1.D17 IC2.33 | length 1462
  Sig2 w6: v1(113.09,1228.96) 113.09,1258.37 282.81,1428.09 282.81,1694.71 343.1,1755 840,1755 860,1775 v1(885,1775)
  BOT w6: v1(113.09,1228.96) 216.87,1228.96 FEP1.D17@217.48,1228.35 ; v1(885,1775) 911.57,1748.43 IC2.33@1059.84,1748.43
TR_BLS: IC2.2 U1.H17 | length 1043.1
  Sig2 w6: v1(1408.26,2025.22) 2088.05,2025.22 2165.27,1948 2165.27,1777.87 U1.H17@2140.35,1752.95
  BOT w6: IC2.2@1360,2024.02 1361.2,2025.22 v1(1408.26,2025.22)
TR_BLS_25: FEP1.D27 IC2.47 | length 1340.4
  TOP w6: v1(125,1545) 180,1545 195,1560 195,1730 506.34,2041.34 v1(975.42,2041.34)
  BOT w6: v1(125,1545) 125.85,1544.15 216.63,1544.15 FEP1.D27@217.48,1543.31 ; v1(975.42,2041.34) 975.73,2041.34 993.06,2024.02 IC2.47@1059.84,2024.02
TS_CLIP: IC2.3 U1.H18 | length 1016.4
  Sig2 w6: v1(1310.56,2004.05) 2030.95,2004.05 2140.35,1894.65 U1.H18@2140.35,1802.95
  BOT w6: v1(1310.56,2004.05) 1359.72,2004.05 IC2.3@1360,2004.33
TS_CLIP_25: FEP1.D26 IC2.46 | length 1424.3
  TOP w6: v1(147.32,1511.06) 196.06,1511.06 230,1545 230,1660.75 584.25,2015 v1(1140,2015)
  BOT w6: v1(147.32,1511.06) 147.7,1511.43 217.1,1511.43 FEP1.D26@217.48,1511.81 ; IC2.46@1059.84,2004.33 1094.33,2004.33 1105,2015 v1(1140,2015)
TX1: U1.C14 U8.4 | length 692
  Sig2 w6: v1(1393.01,1330.41) 1445.41,1330.41 1693.35,1578.35 1862.85,1578.35 1887.45,1602.95 U1.C14@1890.35,1602.95
  BOT w6: U8.4@1321,1353.98 1369.45,1353.98 v1(1393.01,1330.41)
TX1_25: FEP1.C26 U8.20 | length 784.3
  Sig2 w6: v1(466.29,1511.89) 858.76,1511.89 v1(1029.27,1341.38)
  BOT w6: FEP1.C26@390.71,1511.81 390.75,1511.85 466.26,1511.85 v1(466.29,1511.89) ; v1(1029.27,1341.38) 1042.26,1328.39 U8.20@1099,1328.39
TX2: U1.C13 U8.5 | length 815.7
  Sig2 w6: v1(1267.28,1328.91) 1274.48,1328.91 1326.18,1277.2 1467.2,1277.2 1718.21,1528.21 1865.61,1528.21 U1.C13@1890.35,1552.95
  BOT w6: v1(1267.28,1328.91) 1313.2,1328.91 1317.36,1324.75 U8.5@1321,1328.39
TX2_25: FEP1.C25 U8.19 | length 894.7
  Sig2 w6: v1(532.92,1474.91) 647.56,1474.91 806.1,1316.37 1038.76,1316.37 1053.44,1301.69 v1(1154.99,1301.69)
  BOT w6: FEP1.C25@390.71,1480.32 524.81,1480.32 530.21,1474.91 v1(532.92,1474.91) ; U8.19@1099,1302.8 1100.11,1301.69 v1(1154.99,1301.69)
VBGAP: C45.1 U1.C7 | length 58.4
  BOT w10: U1.C7@1890.35,1252.95 1909.15,1234.15 1939.78,1234.15 C45.1@1940.63,1235
VCAL: C53.1 U1.D17 | length 104.5
  BOT w8: U1.D17@1940.35,1752.95 1943.61,1749.7 1943.61,1736.39 1955,1725 1989.96,1725 2000.71,1714.25 C53.1@2000.71,1693.94
VCC1V8: FEP1.C2 FEP1.C3 | length 31.5
  BOT w10: FEP1.C2@390.71,755.91 FEP1.C3@390.71,787.4
VCC2V5: C82.2 C85.2 C86.2 FEP1.A2 FEP1.A3 IC1.31 IC1.42 IC2.31 IC2.42 R28.2 R29.2 U8.23 U8.24 U9.1 U11.1 U11.8 | length 4098.8
  TOP w10: v1(856.91,787.47) 857.02,787.36 v1@857.02,756.34 ; v1(857.13,756.34) v1@857.02,756.34 ; U9.1@913.82,434.37 885.63,434.37 871.69,448.31 v2(786.66,448.31) 786.66,731.66 811.34,756.34 v1@857.02,756.34
  BOT w10: v2(786.66,448.31) 784.75,446.4 784.75,439.33 783.92,438.5 783.92,315.86 789.78,310 905,310 994.37,220.63 C82.2@994.37,115 U11.1@1108,115 1180,115 1210,145 1210,409.14 1215.86,415 U11.8@1302,415 1528.5,415 R28.2@1533.5,410 ; v1(856.91,787.47) 962.71,893.27 991.53,893.27 ; v1(857.13,756.34) 903.83,756.34 983.44,676.73 IC1.31@1059.92,676.73 ; C86.2@999.69,1410 999.69,1384.97 964.39,1349.67 964.39,920.41 991.53,893.27 ; C85.2@999.69,1465 1120.31,1465 R29.2@1160.31,1505 1160.31,1687.8 ; IC2.31@1059.84,1709.06 1139.06,1709.06 1160.31,1687.8 ; IC2.42@1059.84,1925.59 1144.41,1925.59 1194.4,1875.6 1194.4,1721.88 1160.31,1687.8 ; IC1.42@1059.92,893.27 991.53,893.27
  BOT w15: FEP1.A2@784.41,755.91 856.43,755.91 856.86,756.34 v1(857.13,756.34) ; FEP1.A3@784.44,787.44 v1@856.88,787.44 ; C85.2@999.69,1465 C86.2@999.69,1410 ; U8.23@1099,1405.16 1004.53,1405.16 C86.2@999.69,1410 ; U8.24@1099,1430.75 1040.75,1430.75 1024.31,1414.31 1004,1414.31 C86.2@999.69,1410
VCC3V3: C80.2 C83.2 C84.2 FEP1.B2 FEP1.B3 IC1.1 IC1.7 IC1.18 IC1.24 IC2.1 IC2.7 IC2.18 IC2.24 R10.1 U5.8 U8.1 U10.4 U11.14 | length 10898.3
  TOP w20: v2(1177.53,836.14) 1177.53,797.53 1140.11,760.11 949.89,760.11 875,835 764.17,835 v3(683.85,754.68) 683.85,251.15 860,75 v2(1475,75) ; v2(1509.31,74.3) 1509.31,79.31 2779.31,79.31 3185,485 3470.96,770.96 3470.96,1954.04 3370,2055 v1(3370,2400) v1(3370,2430)
  Sig1 w6: v1(1215.21,1007.31) 1476.36,1007.31 1629.05,1160 1675,1160 1743.67,1228.67 1973.67,1228.67 v1(2075,1330)
  Sig2 w10: v1(1215.21,1007.31) 1215.21,1132.54 1235.93,1153.26 1235.93,1244.07 1206.34,1273.66 1206.34,1625.39 1206.34,1630 ; v1(1259.42,1625.39) 1210.96,1625.39 1206.34,1630 ; v1(1300.1,1923.92) 1245.75,1923.92 1206.34,1884.51 1206.34,1630 ; v1(1414.63,556.54) 1414.63,572.12 1423.04,580.54 v1(1423.04,676.06)
  BOT w6: 1259.45,1571.8 1259.45,1693.39 1275.11,1709.06 IC2.18@1360,1709.06 ; v1(1300.1,1923.92) 1358.33,1923.92 IC2.7@1360,1925.59 ; v1(1307.09,2043.92) 1359.79,2043.92 IC2.1@1360,2043.7 ; IC1.24@1360.08,558.62 1362.16,556.54 v1(1414.63,556.54)
  BOT w10: FEP1.B2@611.18,755.91 FEP1.B3@611.18,787.4 ; 1260.4,1571.8 1260.4,1436.61 1266.26,1430.75 U8.1@1321,1430.75 ; 1262.22,1571.8 1281.37,1590.94 IC2.24@1360,1590.94 ; v1(1300.1,1923.92) 1287.49,1936.53 1287.49,2024.32 v1(1307.09,2043.92) ; U11.14@1302,115 1304.5,117.5 1407.81,117.5 C83.2@1410.31,120 1410.31,80 1415.31,75 v2(1475,75) v2@1475,74.3 ; 1319.03,1042.2 1251.73,1042.2 1216.83,1007.31 v1(1215.21,1007.31) 1215.21,869.44 ; IC1.7@1360.08,893.27 1239.03,893.27 1215.21,869.44 ; IC1.1@1360.08,1011.38 1319.03,1011.38 1319.03,1044.88 1354.46,1080.31 C84.2@1415,1080.31 ; v1(1423.04,676.06) 1360.75,676.06 IC1.18@1360.08,676.73 1283.27,676.73 1254.19,705.81 1254.19,759.48 v2(1177.53,836.14) 1181.91,836.14 1215.21,869.44 ; v2(1475,40) v2@1475,74.3 ; v2(1510,40) 1509.66,40.34 1509.66,73.96 v2(1509.31,74.3) ; U10.4@1653,257 1653,187.57 1645,179.57 1645,80.16 1639.14,74.3 v2(1509.31,74.3) ; v1(2075,1330) 2083.95,1338.95 2120.58,1338.95 2126.44,1333.09 2126.44,1295.8 U5.8@2126.97,1295.28 ; v2@1475,74.3 v2(1509.31,74.3)
  BOT w15: FEP1.B2@611.18,755.91 611.56,755.53 683,755.53 v3(683.85,754.68) ; R10.1@3295,2376.49 3300,2381.49 3300,2420 3310,2430 v1(3370,2430)
VCI: C49.1 U1.F2 | length 66.1
  BOT w12: U1.F2@2040.35,1002.95 2040.35,1006.47 2055.71,1021.82 C49.1@2055.71,1062.65
VCL: C41.1 U1.E17 | length 112
  BOT w8: U1.E17@1990.35,1752.95 1992.05,1752.95 2020,1725 2055.21,1725 2066.16,1714.05 C41.1@2066.16,1693.94
VCNP: C51.1 U1.K2 | length 64.6
  BOT w12: C51.1@2228.59,1062.65 2230.92,1060.31 2230.92,1039.9 2240.35,1030.47 U1.K2@2240.35,1002.95
VCPP: C48.1 U1.J2 | length 75
  BOT w8: C48.1@2172.29,1062.65 2185.67,1062.65 2190.35,1057.96 U1.J2@2190.35,1002.95
VCR: C47.1 U1.F1 | length 76.7
  BOT w8: C47.1@2020,884.69 2020,932.6 U1.F1@2040.35,952.95
VDD20AD: C17.1 C18.2 C19.2 C20.2 C21.2 C22.2 C23.1 C24.2 C25.2 C26.2 C27.2 C28.2 C65.2 R9.2 U1.D1 U1.D18 U1.N1 U1.N18 | length 5476
  Sig1 w8: U1.D18@1942.45,1805.05 U1.D18@1940.35,1802.95 1940.35,1799.65 1962.4,1777.6 2365,1777.6 ; U1.N18@2388.44,1804.87 U1.N18@2390.35,1802.95 2365,1777.6 ; v2(2860,980) 2858.07,978.07 2413.07,978.07 2390.35,955.35 U1.N1@2390.35,952.95 2365,978.31 2365,1777.6
  Sig1 w12: v2(2860,980) 3140,980 3160.55,959.45 v4(3275,959.45)
  BOT w8: R9.2@2794.57,2063.07 R9.2@2795,2063.51
  BOT w10: C19.2@1900,885 1874.69,885 1870,880.31 1870,767.44 1905,732.44 1905,570 1950,525 2395,525 2469,599 C24.2@2469,670
  BOT w12: C28.2@1950.71,1880.39 1951.1,1880 2050,1880 2060.4,1890.4 C23.1@2060.4,2154.45
  BOT w15: C19.2@1900,885 1900.16,884.84 1954.84,884.84 C21.2@1955,884.69 1955,935.6 1940.35,950.25 U1.D1@1940.35,952.95 ; U1.D18@1940.35,1802.95 1940.35,1849.72 1950.71,1860.08 C28.2@1950.71,1880.39 1950.96,1880.65 2005.45,1880.65 C26.2@2005.71,1880.91 ; U1.N1@2390.35,952.95 2390.35,914.65 2400,905 C27.2@2400,884.69 2400.16,884.84 2454.84,884.84 C25.2@2455,885 ; U1.N18@2390.35,1802.95 2388.44,1804.87 2388.44,1831.56 2375,1845 C20.2@2375,1875.31 C22.2@2430,1875.31 2489.75,1875.31 2512.35,1897.92 2549.46,1897.92 2621.54,1970 C65.2@2794.57,1970 2794.78,1970.22 2794.78,2062.85 R9.2@2794.57,2063.07 ; C24.2@2469,670 2785,670 2860,745 v2(2860,980) C17.1@2860,1135
VDD35A: C5.1 C6.2 C7.2 C8.2 C9.2 C10.2 C11.2 C12.2 C13.2 C14.2 C29.1 C30.2 C31.2 C32.2 C33.2 C34.2 C39.2 C48.2 C49.2 C50.2 C57.2 R27.2 U1.A1 U1.A18 U1.J1 U1.J18 U1.T1 U1.T18 U2.1 U2.2 U2.3 U2.4 U2.5 U2.6 U2.8 U2.9 U2.16 U2.EPAD U9.5 U9.6 | length 9265.9
  TOP w10: U9.5@965,414.69 U9.6@965,434.37 ; U2.16@1660.09,2431.16 1660.09,2349.91 1670,2340 ; 1837.03,2337.03 1839.29,2339.29 U2.9@1839.29,2431.16 ; U2.8@1839.29,2209.16 1839.29,2304.29 1840,2305 ; 1905,2345 1905,2375 1910,2380 C57.2@1910,2430.16
  TOP w12: U2.EPAD@1772.97,2337.03 1837.03,2337.03 2007.34,2337.03 2017.79,2326.58 2196.25,2326.58 2220,2302.83 2220,2175 2186.12,2141.12 2186.12,2068.11 2289.24,1965 2355,1965 2400,1920 v2(2705,1920)
  TOP w15: R27.2@954.69,335 998.48,335 1016.68,353.2 v2(1018.03,353.2) 1047.47,382.63 1047.47,425.58 1038.68,434.37 U9.6@965,434.37
  Sig1 w15: U1.A1@1790.35,952.95 1790.35,918.79 1799.14,910 2199.14,910 ; U1.A18@1790.35,1802.95 1792.27,1804.87 1792.27,1832.27 1805,1845 2180,1845 2184.99,1840.01 2188.44,1836.56 2188.44,1804.87 U1.J18@2190.35,1802.95 ; U1.J1@2190.35,952.95 2190.35,918.79 2199.14,910 ; U1.T1@2540.35,952.95 2540.35,918.79 2531.57,910 2199.14,910 ; v2(2559.91,814.11) 2959.11,814.11 3027.33,882.33 v4(3274.95,882.33)
  Sig2 w15: U1.T1@2540.35,952.95 2587.95,952.95 2610,975 2610,1776.21 2583.26,1802.95 U1.T18@2540.35,1802.95
  BOT w6: 2141.5,1102.02 2141.5,1044.29 2165,1020.79 2165,963.61 2173.8,954.81 2188.5,954.81 U1.J1@2190.35,952.95
  BOT w8: C29.1@2070,630 2075,635 C29.1@2075,650 ; U1.T1@2540.35,952.95 2541.83,954.43 2609.55,954.43 C7.2@2611.02,952.95
  BOT w10: v2(1018.03,353.2) 953.02,353.2 935,371.22 935,405 1036.47,506.47 1536.47,506.47 1680,650 1680,835 1725.42,880.42 C11.2@1790.41,880.42 ; C10.2@1724.69,1865 C13.2@1724.69,1810 1779.25,1810 1786.3,1802.95 U1.A18@1790.35,1802.95 ; U1.J18@2190.35,1802.95 2190.35,1835.35 2200,1845 2200,1870.31 C34.2@2205,1875.31 C32.2@2265,1875.31
  BOT w12: C14.2@2620.31,1850 2620.31,1880.31 2660,1920 v2(2705,1920) 2730,1920 2777.5,1872.5 2777.5,1795 2795,1777.5 2857.5,1777.5 C5.1@2875,1795
  BOT w15: C10.2@1724.69,1865 1724.69,1981.31 1715,1991 1715,2055 1745,2085 v1@1745,2310 ; C11.2@1790.41,880.42 U1.A1@1790.35,952.95 ; C49.2@2055.71,1102.02 C39.2@2110.71,1102.02 2141.5,1102.02 C48.2@2172.29,1102.02 ; C29.1@2075,650 2075,750 ; C50.2@2075,845 2075,750 ; U1.J1@2190.35,952.95 2190.18,952.78 2190.18,884.86 C33.2@2190,884.69 C31.2@2240,884.69 ; U1.T1@2540.35,952.95 2540.35,833.66 v2(2559.91,814.11) C30.2@2643.51,814.11 ; U1.T18@2540.35,1802.95 2542.27,1804.87 2562.44,1804.87 2562.57,1805 2575,1805 2585,1795 C8.2@2620.31,1795 ; C12.2@2611.02,900.91 C7.2@2611.02,952.95 ; C9.2@2620,1751.5 2620.31,1751.81 C8.2@2620.31,1795 ; C14.2@2620.31,1850 C8.2@2620.31,1795 ; C30.2@2641.71,806.91 C30.2@2650.71,806.91 2650.71,764.8 2635.91,750 2075,750
  other v1: 1710,2305 1745,2305 1780,2305 1710,2345 1745,2345 1780,2345
VDDPIX_LDC: C35.2 C36.2 C37.2 R24.2 U1.G17 | length 2638.8
  TOP w12: v7(2240.3,2084.99) 2306.78,2018.5 R24.2@2501.55,2018.5
  Sig1 w10: v4(655,2550) 1000,2205 1920,2205 2040.01,2084.99 v7(2240.3,2084.99)
  BOT w8: U1.G17@2090.35,1752.95 2115,1777.6 2115,1952.5 2168.5,2006 C35.2@2235,2006
  BOT w10: U1.G17@2090.35,1752.95 2093.22,1750.08 2093.22,1726.78 2100,1720 2121.3,1720 2131.62,1709.69 C37.2@2131.62,1693.94 C36.2@2197.07,1693.94
  BOT w12: C35.2@2235,2021 2240.3,2026.3 v7(2240.3,2084.99)
VDRH: C1.2 C2.2 C3.2 C4.2 C15.2 C16.2 R19.2 U1.P12 U1.P13 U1.P14 | length 1872.8
  TOP w8: U1.P12@2440.35,1502.95 2465.51,1528.11 2601.89,1528.11 2890.63,1239.37 R19.2@2943.9,1239.37 2943.9,961.1 3090,815 3269.45,815 v4(3275,809.45)
  BOT w8: C1.2@2280,1684.37 2280.49,1683.88 2368.54,1683.88 2382.39,1670.03 2382.39,1651.43 2383.23,1650.59 C16.2@2383.23,1590.59 ; C15.2@2344.69,1420 2375,1420 2385,1430 2385,1474.45 C3.2@2383.54,1475.91 2383.23,1476.22 C16.2@2383.23,1590.59 ; C16.2@2382.91,1590.91 C16.2@2383.23,1590.59 ; U1.P12@2440.35,1502.95 U1.P13@2440.35,1552.95 ; U1.P14@2440.35,1602.95 U1.P13@2440.35,1552.95 ; C16.2@2383.23,1590.59 2417.61,1556.21 2437.1,1556.21 U1.P13@2440.35,1552.95
VLS: C38.1 U1.E2 | length 64
  BOT w12: U1.E2@1990.35,1002.95 1990.35,1006.47 2000.71,1016.82 C38.1@2000.71,1062.65
VNP: C52.1 U1.K1 | length 107.2
  BOT w8: U1.K1@2240.35,952.95 2240.35,919.69 2245.04,915 2275.87,915 2290.43,900.43 2290.43,885.12 C52.1@2290,884.69
VPL: C43.1 U1.C17 | length 145.6
  BOT w8: U1.C17@1890.35,1752.95 1915,1777.6 1915,1840.79 1895.71,1860.08 C43.1@1895.71,1880.39
VRB: C50.1 U1.G1 | length 74.9
  BOT w8: C50.1@2075,884.37 2075,933.66 2090.35,949.01 U1.G1@2090.35,952.95
VRC: C39.1 U1.G2 | length 68.1
  BOT w12: U1.G2@2090.35,1002.95 2090.35,1005.38 2110.71,1025.73 C39.1@2110.71,1062.65
VREF: C42.1 U1.L2 | length 62.4
  BOT w12: C42.1@2283.86,1062.65 2283.86,1012.97 2290.35,1006.47 U1.L2@2290.35,1002.95
VRF: C40.1 U1.M2 | length 59.7
  BOT w12: U1.M2@2340.35,1002.95 2340.42,1003.02 2340.42,1062.58 C40.1@2340.48,1062.65
VRS: C44.1 U1.L1 | length 106
  BOT w8: U1.L1@2290.35,952.95 2290,952.6 2290,934.69 2294.69,930 2320,930 2345,905 C44.1@2345,884.69
VTZ: U1.F17 U8.6 | length 1045.4
  Sig1 w6: v1(1401.02,1298.81) 1513.81,1298.81 1610.42,1395.42 1670.42,1395.42 1705,1430 1950,1430 2040.35,1520.35 U1.F17@2040.35,1752.95
  BOT w6: U8.6@1321,1302.8 1394.33,1302.8 1398.31,1298.81 v1(1401.02,1298.81)
VTZ_25: FEP1.C24 U8.18 | length 780.1
  Sig2 w6: v1(462.98,1449.68) 537.96,1449.68 691.05,1296.59 1016.91,1296.59 v1(1036.27,1277.23)
  BOT w6: FEP1.C24@390.71,1448.82 391.57,1449.68 v1(462.98,1449.68) ; v1(1036.27,1277.23) U8.18@1099,1277.2
pads on no net: FEP1.A4 FEP1.A5 FEP1.A15 FEP1.A16 FEP1.A20 FEP1.A21 FEP1.B26 FEP1.B27 FEP1.C17 FEP1.C18 FEP1.C21 FEP1.D2 IC2.23 IC2.26 U1.A2 U1.A3 U1.A4 U1.A5 U1.A6 U1.A7 U1.A8 U1.A9 U1.A10 U1.A11 U1.A12 U1.A13 U1.A14 U1.A15 U1.A16 U1.A17 U1.C5 U1.C6 U1.D3 U1.T2 U1.T3 U1.T4 U1.T5 U1.T6 U1.T7 U1.T8 U1.T9 U1.T10 U1.T11 U1.T12 U1.T13 U1.T14 U1.T15 U1.T16 U1.T17 U3.2 U3.11 U3.15 U4.6 U4.7 U5.2 U5.3 U5.5 U5.6 U5.7 U8.10 U8.14 U10.8 U11.2 U11.6 U11.9 U11.13
copper on no net: | length 85.5
  BOT w6: v1(305.22,1354.33) 390.71,1354.33

## Polygon pours and split planes (outlines as drawn)
no net on TOP "NONET_L01_P002" (solid, pour order 2): 2180.32,1950.16
no net on BOT "NONET_L06_P018" (solid, pour order 18): 875,1275
no net on BOT "NONET_L06_P017" (solid, pour order 17): 870,1430
no net on BOT "NONET_L06_P016" (solid, pour order 16): 865,1560
no net on BOT "NONET_L06_P013" (solid, pour order 13): -1148.99,1049.45
GND on GND1 (split plane): 3523.21,2637.82 3523.21,146.08 3397.23,20.1 138.32,20.1 20.1,138.32 20.1,2591.12 164.78,2735.81 3425.22,2735.81
GND on GND2 (split plane): 3523.21,2637.82 3523.21,146.08 3397.23,20.1 138.32,20.1 20.1,138.32 20.1,2591.12 164.78,2735.81 3425.22,2735.81

## Other copper
TOP:
  rectangle net 5V_IN: 580,2320 645,2385
  rectangle net VCC3V3: 1460,25 1525,95
  region net VDD35A: 1929.69,2385.16 1749.69,2385.16 1749.69,2260.16 1929.69,2260.16
  region net VDD35A: 2104.69,2380 1910,2380 1910,2210.16 2104.69,2210.16
  region net VDD35A: 1789.69,2270.16 1654.69,2270.16 1654.69,2180.16 1789.69,2180.16
  region net VDD35A: 1859.69,2385.16 1654.69,2385.16 1654.69,2260.16 1859.69,2260.16
  region net 5V_IN: 1818.69,2560.16 1704.69,2560.16 1704.69,2408.66 1818.69,2408.66
BOT:
  rectangle net 5V_IN: 580,2320 645,2385
  rectangle net GND: 157.24,1574.8 459.92,1606.89

## Silkscreen, mask and mechanical layers (free items; w line width, h text height)
Top Overlay:
  text "+4.5V" at 450,2620 h25
  text "VDDPIX_LDC" at 385,2530 h25
  text "VDD20D" at 3260,945 h25
  text "VDD35A" at 3250,864.45 h25
  text "VDRH" at 3275,789.45 h25
Mechanical 1:
  lines w5: 3543.31,137.76 3405.55,0 130,0 0,130 0,2599.45 156.46,2755.91 3433.54,2755.91 3543.31,2646.14

## Text inside footprints (layer, text, board x,y; h text height)
FEP1: Bottom Overlay "C30" at 355.94,1773.19 h30 r270; Bottom Overlay "D30" at 220.94,1773.19 h30 r270; Bottom Overlay "C1" at 335.94,518.19 h30 r270; Bottom Overlay "D1" at 235.94,518.19 h30 r270; Bottom Overlay "A30" at 750.94,1778.19 h30 r270; Bottom Overlay "B30" at 625.94,1778.19 h30 r270; Bottom Overlay "A1" at 730.94,518.19 h30 r270; Bottom Overlay "B1" at 630.94,518.19 h30 r270
U2: Top Overlay "*" at 1651.09,2186.66 h50 r90; Mechanical 13 "*" at 1702.19,2234.16 h50 r90
U3: Bottom Overlay "*" at 3169.6,2331.5 h50 r270; Mechanical 13 "*" at 3118.5,2379 h50 r270
U8: Bottom Overlay "*" at 1343.5,1439.75 h50; Mechanical 13 "*" at 1343.5,1439.75 h50
U11: Bottom Overlay "*" at 1085.5,98 h50 r180; Mechanical 13 "*" at 1085.5,98 h50 r180